# Altium PCB esp_loadcell_pcb.PcbDoc
Units mm, origin at the board's own origin, x right, y up, seen from the top; angles counter-clockwise.
Board outline 40 x 30 mm, 2 copper layers (Top Layer, Bottom Layer); 29 components, 19 nets, 128 pads, 8 vias.
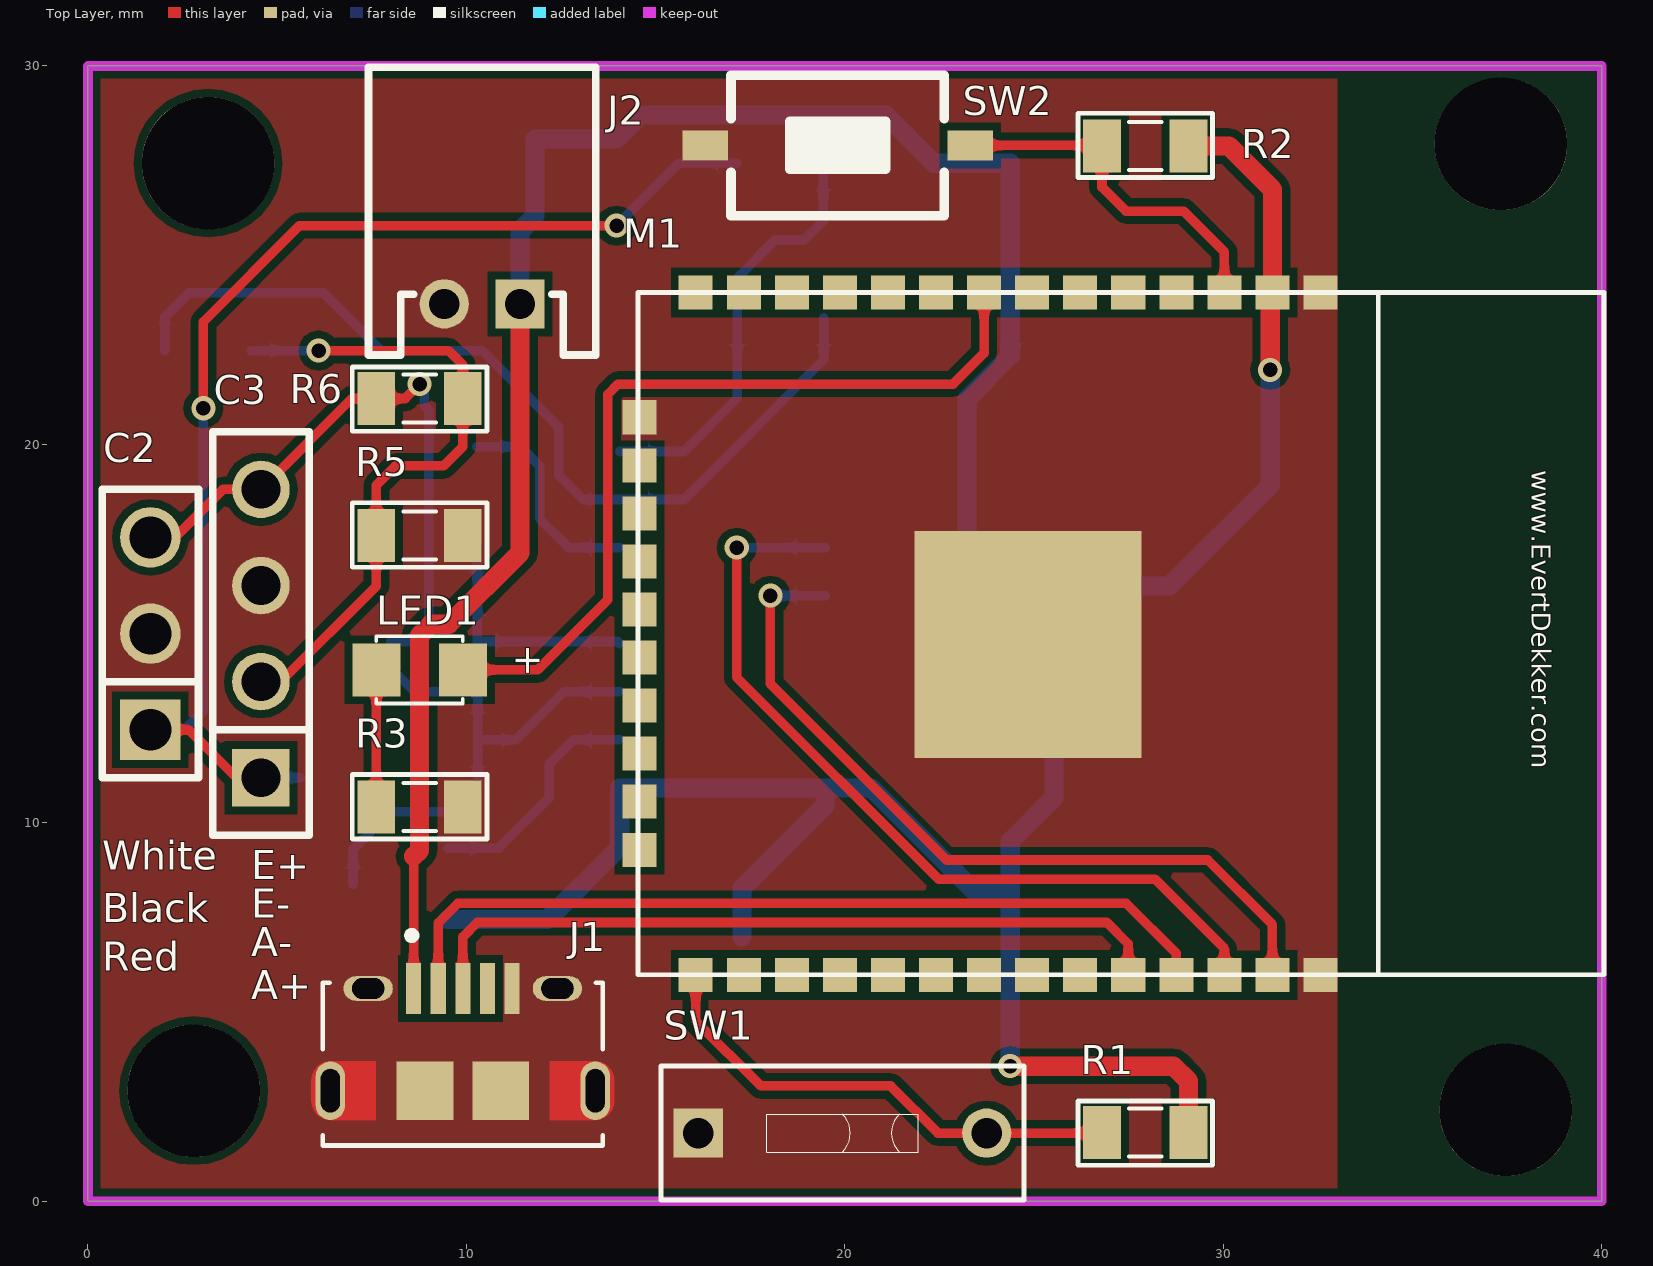
[diagram p0: Top Layer view]
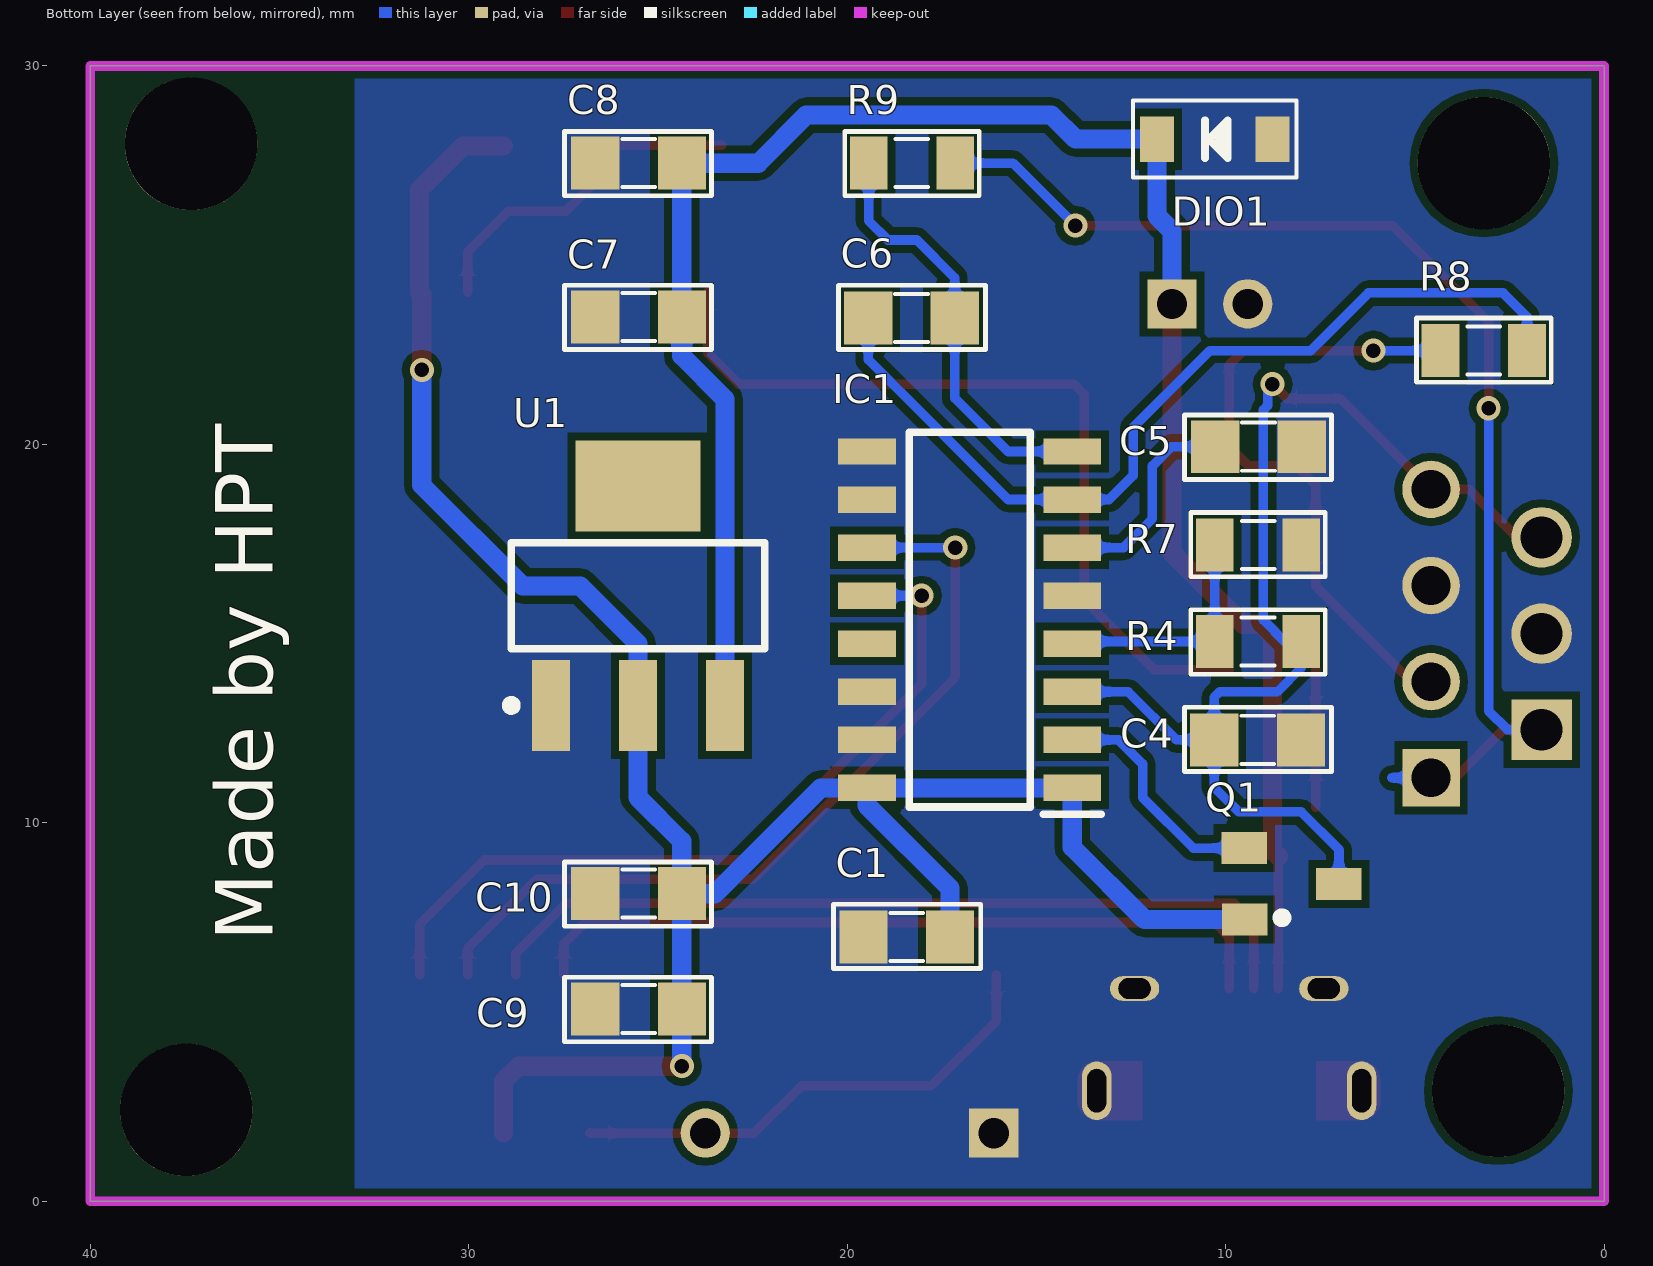
[diagram p1: Bottom Layer view, seen from below]
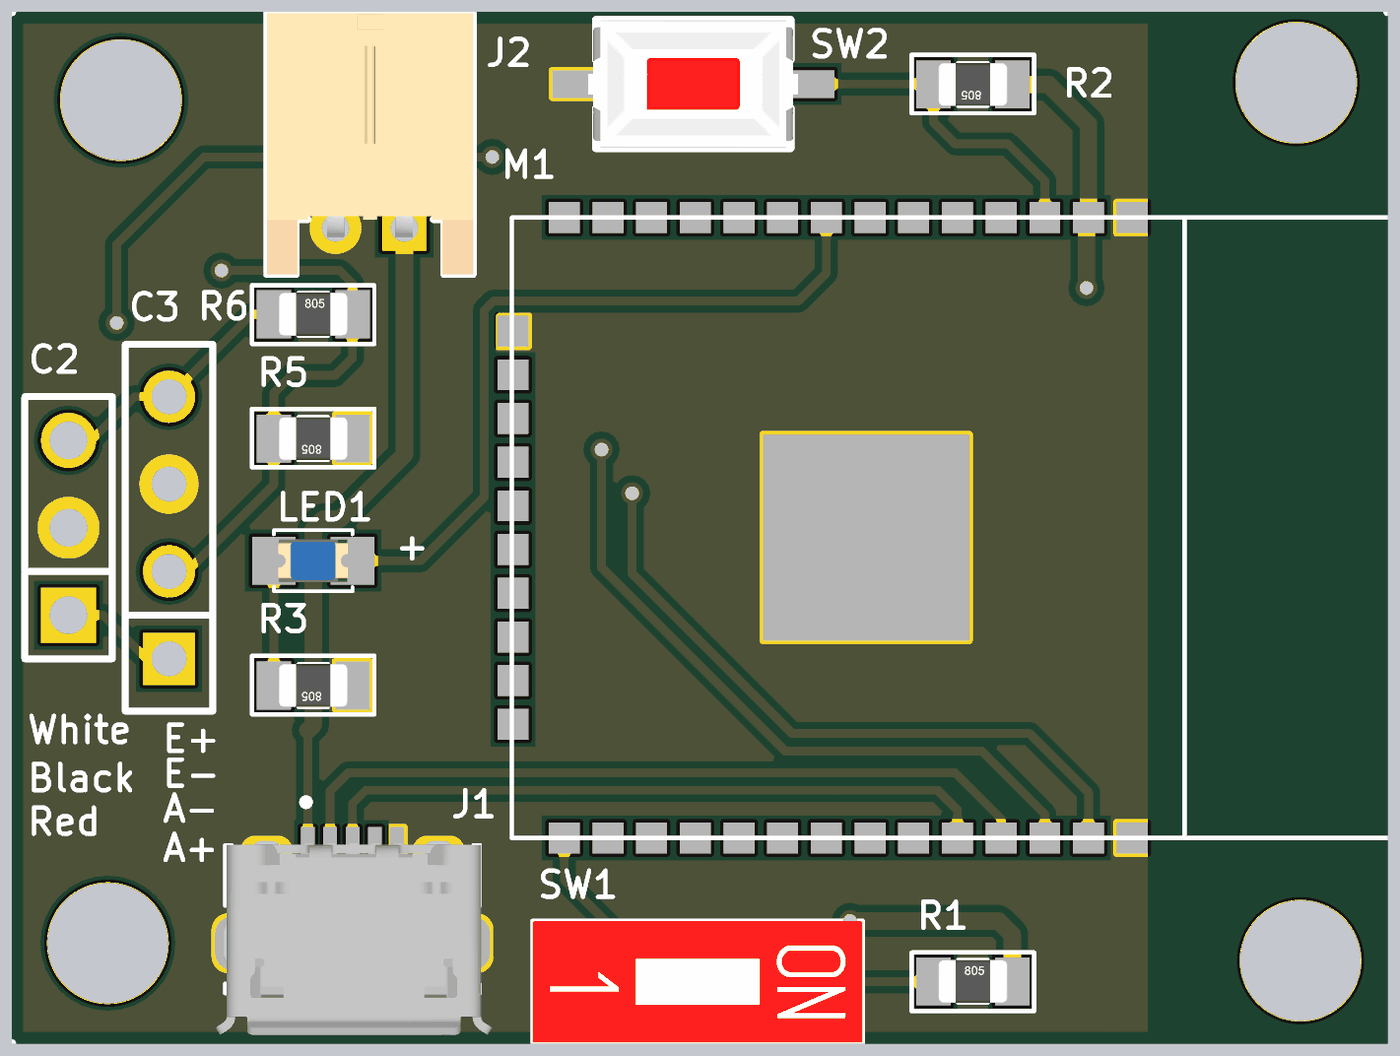
[diagram p2: 3D render of the assembled board from above, using the file's embedded part models]
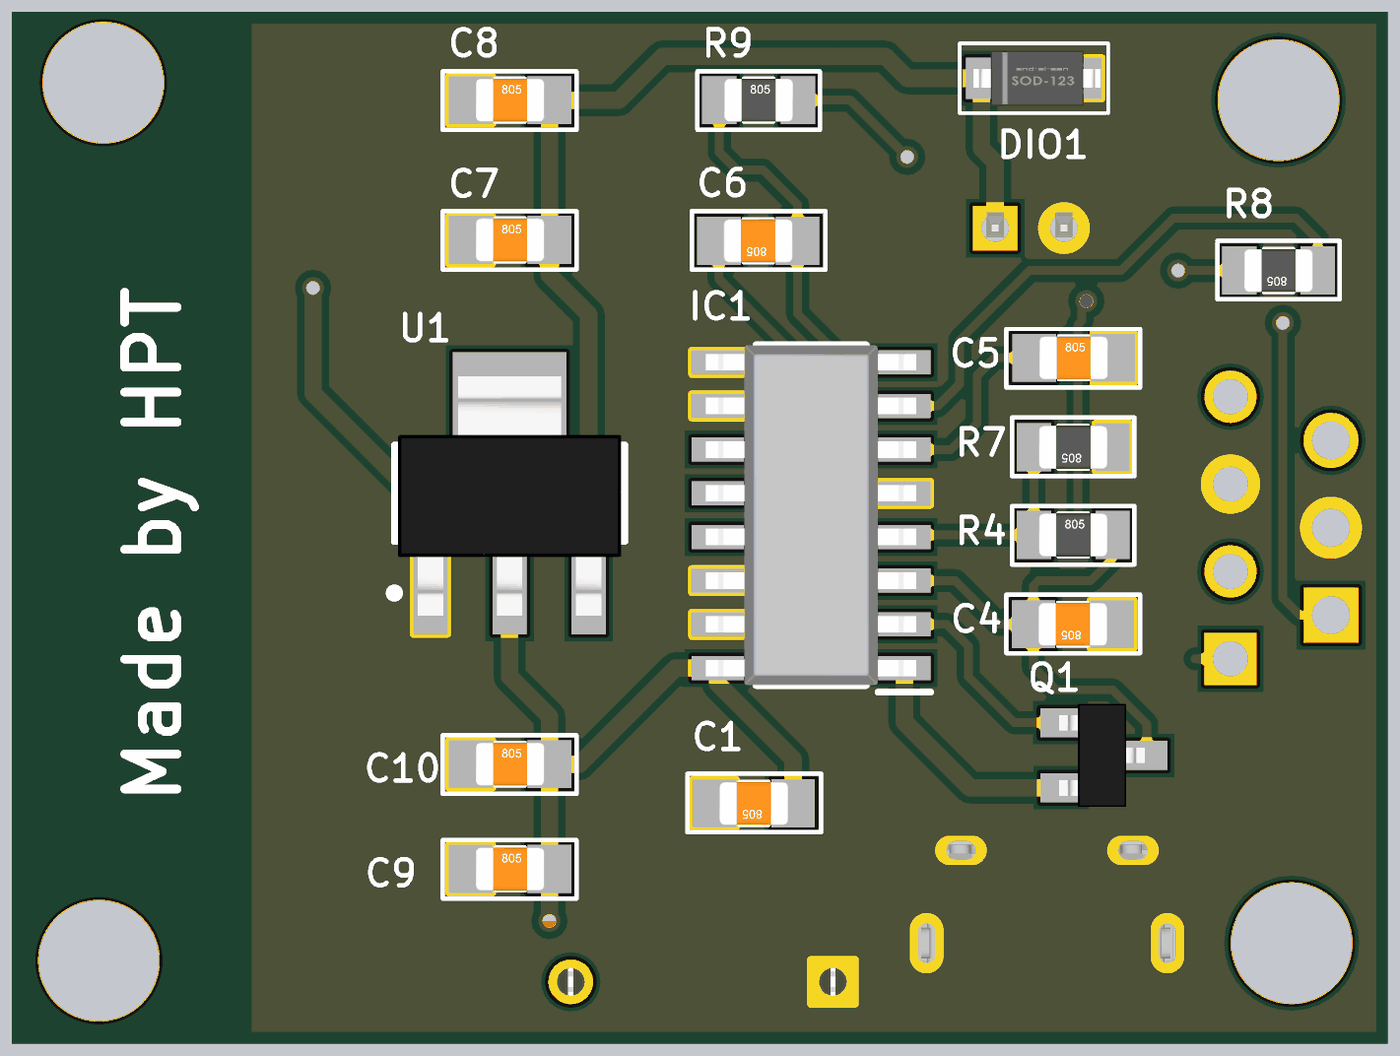
[diagram p3: 3D render of the assembled board from below, using the file's embedded part models]

## Layer stack, top to bottom
Top Solder: solder mask 0.0102, Solder Resist, Dk 3.5
Top Layer: signal copper 0.0356
Dielectric 1: dielectric 0.32, FR-4, Dk 4.8
Bottom Layer: signal copper 0.0356
Bottom Solder: solder mask 0.0102, Solder Resist, Dk 3.5

## Board outline
0,0 0,30 40,30 40,0

## Design rules (kind name [scope] priority, off if disabled: settings)
Clearance [All] p1: gap=0.203
HoleSize [All] p1: absolutevalues=TRUE maxlimit=3.81 minlimit=0.025 maxpercent=80.000 minpercent=20.000
PlaneConnect [All] p1: planeconnectstyle=Direct reliefexpansion=0.508 reliefentries=4 reliefconductorwidth=0.254 reliefairgap=0.254
PolygonConnect [All] p1: connectstyle=Direct reliefconductorwidth=0.254 reliefentries=4 polygonreliefangle="90 Angle" airgapwidth=0.254
RoomDefinition esp_loadcell_schematic [InComponentClass('esp_loadcell_schematic')] p1: confinementstyle=ConfineIn formatcopy=TRUE lockcomponents=FALSE outline 42.037,-0.635 204.47,-0.635 204.47,28.448 42.037,28.448
RoutingVias [All] p1: holewidth=0.381 width=0.635 viastyle="Through Hole" minholewidth=0.381 minwidth=0.635 maxholewidth=0.711 maxwidth=3.81
SolderMaskExpansion [All] p1: expansion=0.102
Width [All] p1: maxlimit=1.27 minlimit=0.203 preferedwidth=0.254
28 further rules are at their usual default settings.

## Components (designator, comment, footprint, x,y, rotation, side; value= is the part's Value field where it differs from the comment)
C1 "10uF" SM-CAP-0805 17.285,6.985 r0 bottom
C2 "JP3" JP3-D1T 1.651,12.46 r90 top
C3 "JP4" JP4-C1T 4.572,11.19 r90 top
C4 "10uF" SM-CAP-0805 8.014,12.192 r0 bottom
C5 "0.1uF" SM-CAP-0805 10.274,19.939 r180 bottom
C6 "0.1uF" SM-CAP-0805 17.158,23.343 r0 bottom
C7 "104" SM-CAP-0805 26.657,23.368 r180 bottom
C8 "104" SM-CAP-0805 26.657,27.432 r180 bottom
C9 "104" SM-CAP-0805 26.657,5.08 r180 bottom
C10 "104" SM-CAP-0805 26.657,8.128 r180 bottom
DIO1 "Diode SMD" DIO-SMD-123 10.287,28.067 r180 bottom
IC1 "HX711" SOIC127P600X160-16N 16.764,15.367 r0 bottom
J1 "10118194-0001LF" AMPHENOL_10118194-0001LF 9.906,2.921 r0 top
J2 "62000211722" 62000211722 10.414,26.162 r180 top
LED1 "LED" LED-0805-Blue 9.906,14.042 r180 top
M1 "ESP32S_Module" ESP32S 14.536,24.017 r270 top
Q1 "A1015" SOT23B 8.255,8.382 r270 bottom
R1 "10K" RES-SMD-0805 27.94,1.812 r0 top
R2 "10K" RES-SMD-0805 27.94,27.888 r180 top
R3 "1K" RES-SMD-0805 8.763,10.414 r180 top
R4 "20K" RES-SMD-0805 9.144,14.791 r180 bottom
R5 "1K" RES-SMD-0805 8.763,17.594 r180 top
R6 "1K" RES-SMD-0805 8.763,21.209 r0 top
R7 "8K2" RES-SMD-0805 9.144,17.34 r0 bottom
R8 "1K" RES-SMD-0805 3.175,22.479 r0 bottom
R9 "1K" RES-SMD-0805 18.288,27.432 r180 bottom
SW1 "flash" SW-DIP1-1 19.939,1.8 r270 top
SW2 "Reset" SW1-SMD 19.812,27.901 r180 top
U1 "LM1117-3.3V" SOT223 25.527,16.002 r180 bottom

## Footprints (in the part's own frame and the unit in brackets; to place one, negate y for a bottom-side part, rotate by r counter-clockwise, add the part's x,y. Pads: shape width x height; smd on the part's side, far side on the other; paste and mask are expansions set on the pad)
62000211722 [mm] "2.00mm Male Horizontal Shrouded Header, 2p"
  rect 1.3x1.3 hole 0.8: 1(-1,2.45)
  round 1.3 hole 0.8: 2(1,2.45)
  silkscreen extent -3,-3.8 3,3.8, body extent -3,-3.8 3,3.8, height 4.85
AMPHENOL_10118194-0001LF [mm]
  rect 0.4x1.35 smd: 1(-1.3,2.7) 2(-0.65,2.7) 3(0,2.7) 4(0.65,2.7) 5(1.3,2.7)
  oval 1.3x0.65 hole 0.55 slot 0.85 at 0 deg: S1(-2.5,2.7) S2(2.5,2.7)
  oval 0.775x1.55 hole 0.5 slot 1.15 at 90 deg: S3(-3.5,0) S6(3.5,0)
  rect 1.5x1.55 smd: S4(-1,0) S5(1,0)
  Top Layer region: 193 vertices and 0 holes, not listed, extent -4,-0.775 -2.3,0.78
  Top Layer region: 193 vertices and 0 holes, not listed, extent 2.3,-0.78 4,0.775
  silkscreen extent -3.7,-1.45 3.7,4.2, body extent -3.99,-2.67 4.06,2.91, height 3.12
DIO-SMD-123 [mm]
  rect 0.9x1.2 smd: 1(1.524,0) 2(-1.524,0)
  silkscreen extent -2.16,-1.02 2.16,1.02, body extent -1.76,-0.8 1.94,0.8, height 1.25
ESP32S [mm] "ESP32S-Module"
  rect 0.9x0.9 smd: 1(0,18.034) 2(0,16.764) 3(0,15.494) 4(0,14.224) 5(0,12.954) 6(0,11.684) 7(0,10.414) 8(0,9.144) 9(0,7.874) 10(0,6.604) 11(0,5.334) 12(0,4.064) 13(0,2.794) 14(0,1.524) 15(3.3,0.034) 16(4.57,0.034) 17(5.84,0.034) 18(7.11,0.034) 19(8.38,0.034) 20(9.65,0.034) 21(10.92,0.034) 22(12.19,0.034) 23(13.46,0.034) 24(14.73,0.034) 25(18.034,1.524) 26(18.034,2.794) 27(18.034,4.064) 28(18.034,5.334) 29(18.034,6.604) 30(18.034,7.874) 31(18.034,9.144) 32(18.034,10.414) 33(18.034,11.684) 34(18.034,12.954) 35(18.034,14.224) 36(18.034,15.494) 37(18.034,16.764) 38(18.034,18.034)
  rect 6x6 smd: 101(9.3,10.3)
  silkscreen extent 0,0 18.03,25.53, body extent 0,0 18.03,25.53, height 2
JP3-D1T [mm] "3 pins, 1 row, straight, gold plating"
  rect 1.6x1.6 hole 1.1: 1(0,0)
  round 1.6 hole 1.1: 2(2.54,0) 3(5.08,0)
  silkscreen extent -1.27,-1.27 6.35,1.27
JP4-C1T [mm] "4 row, straight, gold plating"
  rect 1.52x1.52 hole 1.02: 1(0,0)
  round 1.52 hole 1.02: 2(2.54,0) 3(5.08,0) 4(7.62,0)
  silkscreen extent -1.52,-1.27 9.14,1.27
LED-0805-Blue [mil]
  rect 50x55 smd: 1(0,0) 2(90,0)
  silkscreen extent 0,-35 90,35, body extent 5,-25 85,25, height 43
RES-SMD-0805 [mil]
  rect 39.37x55 smd: 1(-45,0) 2(45,0)
  silkscreen extent -70,-34 70,33, body extent -39,-25 39,25, height 31
SM-CAP-0805 [mil]
  rect 50x55 smd: 1(0,0) 2(90,0)
  silkscreen extent -32,-34 121,33, body extent 6,-25 84,25, height 31
SOIC127P600X160-16N [mm]
  rect 1.525x0.7 smd: 1(-2.712,4.445) 2(-2.712,3.175) 3(-2.712,1.905) 4(-2.712,0.635) 5(-2.712,-0.635) 6(-2.712,-1.905) 7(-2.712,-3.175) 8(-2.712,-4.445) 9(2.712,-4.445) 10(2.712,-3.175) 11(2.712,-1.905) 12(2.712,-0.635) 13(2.712,0.635) 14(2.712,1.905) 15(2.712,3.175) 16(2.712,4.445)
  silkscreen extent -3.47,-4.95 1.6,5.15, body extent -3.06,-4.94 3.06,4.94, height 2.05
SOT23B [mm] "SOT 23B"
  rect 0.85x1.2 smd: 1(0.94,-1.245) 2(0,1.25) 3(-0.95,-1.25)
  silkscreen extent 0.77,-0.38 1.02,-0.13, body extent -1.5,-1.3 1.5,1.2, height 1.06
SOT223 [mm]
  rect 1x2.4 smd: 1(-2.3,-2.9) 2(0,-2.9) 3(2.3,-2.9)
  rect 3.3x2.4 smd: 4(0,2.9)
  silkscreen extent -3.48,-3.02 3.35,1.4, body extent -3.25,-3.56 3.25,3.4, height 1.68
SW1-SMD [mm]
  rect 1.2x0.8 smd: 1(-3.5,0) 2(3.5,0)
  silkscreen extent -2.82,-1.85 2.82,1.85, body extent -3.05,-1.85 3.05,1.85, height 2.5
SW-DIP1-1 [mm] "01p, 2.54mm Pitch, Horizontal, Box Type, THT, flat Actuator, red, without Tape, Tube"
  rect 1.3x1.3 hole 0.8: 1(0,-3.81)
  round 1.3 hole 0.8: 2(0,3.81)
  silkscreen extent -1.77,-4.8 1.77,4.8, body extent -1.77,-4.8 1.77,4.8, height 5.4

## Part data
C1 C4 C5 C6 C7 C8 C9 C10: library part CN
C2 C3: "WR-PHD 2.54 mm Angled Socket Header"
DIO1: "Default Diode"
IC1: "Integrated Circuit"
J1: "USB - micro B USB 2.0 Receptacle Connector 5 Position Surface Mount, Right Angle; Through Hole"
J2: "WR-WTB 2.00mm Male Horizontal Shrouded Header, 2p"
LED1: library part "LED SMD"
M1: "Esp-32S"
Q1: "PNP 600mW, ECB"
R1 R2 R3 R4 R5 R6 R7 R8 R9: library part Res-SMD, "Resistor"
SW1 SW2: library part SW2, "Switch button 2 pin"
U1: library part LM1117, "800mA Low-Dropout Linear Regulator"

## Free pads (board coordinates)
  round 3.5 hole 3.5: 2(2.794,2.921) 2(3.175,27.432) 2(37.338,27.94) 2(37.465,2.413)

## Via types
v1: diameter 0.635, hole 0.381, Top Layer to Bottom Layer, tented both sides, 8 vias

## Nets (pads, with @x,y where several pads share a name; then routed paths per layer and width w, separated by ;. In a path a pad name is that pad's centre, name@x,y a point inside that pad or via, vN(x,y) a via of type N, cw(c..) or ccw(c..) an arc to the next point about the centre after c; other vN are vias at no path point)
3.3V: C1.1 C9.2 C10.2 IC1.1 IC1.16 M1.2 Q1.1 R1.2 R2.1 U1.2 | length 59.1
  Top Layer w0.508: v1(24.371,3.569) 28.689,3.569 29.083,3.175 R1.2 ; R2.1 30.151,27.888 31.3,26.739 M1.2 31.242,23.959 v1(31.242,21.971)
  Bottom Layer w0.508: Q1.1 12.141,7.442 14.052,9.353 IC1.1 IC1.16 ; C1.1 17.285,8.268 19.476,10.459 IC1.16 ; v1(24.371,3.569) C9.2 C10.2 ; v1(31.242,21.971) 31.242,18.923 28.575,16.256 27.051,16.256 25.527,14.732 U1.2 25.527,10.668 24.371,9.512 C10.2 ; IC1.16 20.701,10.922 23.495,8.128 C10.2
5V: C7.2 C8.2 DIO1.2 J1.1 J2.1 U1.3 | length 52.2
  Top Layer w0.254: J1.1 8.606,9.114
  Top Layer w0.508: 8.606,9.114 8.763,9.271 8.763,14.951 9.061,15.248 9.533,15.248 11.414,17.129 J2.1
  Bottom Layer w0.508: J2.1 11.414,25.638 11.811,26.035 DIO1.2 13.97,28.067 14.605,28.702 21.082,28.702 22.352,27.432 C8.2 C7.2 24.371,22.339 23.227,21.195 U1.3
A+: C2.1 C3.1 R9.2 | length 32.2
  Top Layer w0.254: C2.1 2.653,12.46 3.923,11.19 C3.1 ; v1(3.048,20.955) 3.048,23.241 5.588,25.781 v1(13.97,25.781)
  Bottom Layer w0.254: C2.1 2.554,12.46 3.048,12.954 v1(3.048,20.955) ; C3.1 5.602,11.19 ; v1(13.97,25.781) 15.621,27.432 R9.2
A-: C3.2 R5.2 R6.2 R8.2 | length 17.4
  Top Layer w0.254: C3.2 5.094,13.73 7.62,16.256 R5.2 7.62,18.923 8.128,19.431 9.398,19.431 9.906,19.939 R6.2 9.906,22.098 9.525,22.479 v1(6.096,22.479)
  Bottom Layer w0.254: R8.2 v1(6.096,22.479)
DOUT: IC1.12 M1.37 | length 21
  Top Layer w0.254: v1(18.034,16.002) 18.034,13.672 22.689,9.017 29.591,9.017 31.3,7.308 M1.37
  Bottom Layer w0.254: v1(18.034,16.002) IC1.12
E+: C2.3 C3.4 C4.2 IC1.3 Q1.2 R4.2 R6.1 | length 31.2
  Top Layer w0.254: C2.3 2.3,17.54 3.57,18.81 C3.4 6.971,21.209 R6.1 8.382,21.209 v1(8.763,21.59)
  Bottom Layer w0.254: Q1.2 7.005,9.291 8.001,10.287 9.652,10.287 10.3,10.935 C4.2 ; v1(8.763,21.59) 8.89,21.463 8.89,21.024 9.004,20.91 9.004,15.354 8.441,14.791 R4.2 8.001,14.097 8.636,13.462 10.16,13.462 10.3,13.322 C4.2 ; IC1.3 12.573,13.462 11.303,12.192 C4.2
GND: C1.2 C2.2 C3.3 C4.1 C5.2 C7.1 C8.1 C9.1 C10.1 DIO1.1 IC1.5 IC1.9 IC1.10 IC1.14 IC1.15 J1.5 J1.S1 J1.S2 J1.S3 J1.S4 J1.S5 J1.S6 J2.2 M1.1 M1.15 M1.38 M1.101 R3.1 R5.1 R7.1 SW1.1 SW2.2 U1.1
NetC5_1: C5.1 IC1.6 | length 5.7
  Bottom Layer w0.254: C5.1 11.43,19.939 11.938,19.431 11.938,18.034 12.7,17.272 IC1.6
NetC6_1: C6.1 IC1.8 R9.1 | length 11.3
  Bottom Layer w0.254: IC1.8 15.748,19.812 17.158,21.222 C6.1 17.158,24.397 18.161,25.4 18.923,25.4 19.431,25.908 R9.1
NetC6_2: C6.2 IC1.7 R8.1 | length 24.2
  Bottom Layer w0.254: R8.1 2.032,23.368 2.667,24.003 6.223,24.003 7.747,22.479 10.414,22.479 12.446,20.447 12.446,19.177 13.081,18.542 IC1.7 15.748,18.542 19.444,22.238 C6.2
NetIC1_2: IC1.2 Q1.3 | length 6.3
  Bottom Layer w0.254: Q1.3 10.856,9.332 12.192,10.668 12.192,11.557 12.827,12.192 IC1.2
NetIC1_4: IC1.4 R4.1 R7.2 | length 6.3
  Bottom Layer w0.254: R7.2 R4.1 13.993,14.791 IC1.4
NetLED1_1: LED1.1 M1.8 | length 22
  Top Layer w0.254: LED1.1 11.883,14.042 13.739,15.898 13.739,21.325 14.005,21.59 22.86,21.59 23.68,22.41 M1.8
NetLED1_2: LED1.2 R3.2 | length 3.6
  Top Layer w0.254: R3.2 LED1.2
NetM1_3: M1.3 R2.2 SW2.1 | length 9.6
  Top Layer w0.254: SW2.1 26.784,27.901 R2.2 26.797,26.797 27.432,26.162 28.956,26.162 30.03,25.088 M1.3
NetM1_25: M1.25 R1.1 SW1.2 | length 13.2
  Top Layer w0.254: M1.25 16.06,4.768 17.78,3.048 21.209,3.048 22.457,1.8 SW1.2 26.784,1.8 R1.1
PD_SCK: IC1.11 M1.36 | length 22.3
  Top Layer w0.254: v1(17.145,17.272) 17.145,13.843 22.479,8.509 28.194,8.509 30.03,6.673 M1.36
  Bottom Layer w0.254: v1(17.145,17.272) IC1.11
RX: J1.2 M1.35 | length 22.6
  Top Layer w0.254: J1.2 9.256,7.351 9.779,7.874 27.432,7.874 28.76,6.546 M1.35
TX: J1.3 M1.34 | length 20.2
  Top Layer w0.254: J1.3 9.906,6.985 10.287,7.366 26.924,7.366 27.49,6.8 M1.34
pads on no net: IC1.13 J1.4 M1.4 M1.5 M1.6 M1.7 M1.9 M1.10 M1.11 M1.12 M1.13 M1.14 M1.16 M1.17 M1.18 M1.19 M1.20 M1.21 M1.22 M1.23 M1.24 M1.26 M1.27 M1.28 M1.29 M1.30 M1.31 M1.32 M1.33 U1.4

## Polygon pours and split planes (outlines as drawn)
GND on Bottom Layer "Top Layer-No Net" (solid, pour order 0): 0,30 33.02,30 33.02,0 0,0
GND on Top Layer "Top Layer-No Net" (solid, pour order 2): 0,30 33.02,30 33.02,0 0,0

## Keep-outs
Keep-Out Layer:
  the board outline again, w0.254

## Silkscreen, mask and mechanical layers (free items; w line width, h text height)
Top Overlay:
  text "+" at 11.938,13.843 h0.76 r90
  text "White" at 0.381,8.763 h0.76
  text "E+" at 4.318,8.509 h0.76
  text "E-" at 4.318,7.493 h0.76
  text "Black" at 0.381,7.366 h0.76
  text "A-" at 4.318,6.477 h0.76
  text "Red" at 0.381,6.096 h0.76
  text "A+" at 4.318,5.334 h0.76
Bottom Overlay:
  text "Made by HPT" at 35.179,6.875 h1.52 r270

## Dimensions
0,30 to 40,30 on Top Overlay
0,30 to 0,0 on Top Overlay

## Text inside footprints (layer, text, board x,y; h text height)
J1: Mechanical 13 "PCB END" at 7.956,0.821 h0.5
M1: Top Overlay "www.EvertDekker.com" at 38.158,19.318 h0.5 r270